# EAGLE board GPS_radiologger_v12 (EAGLE 9.5.1)
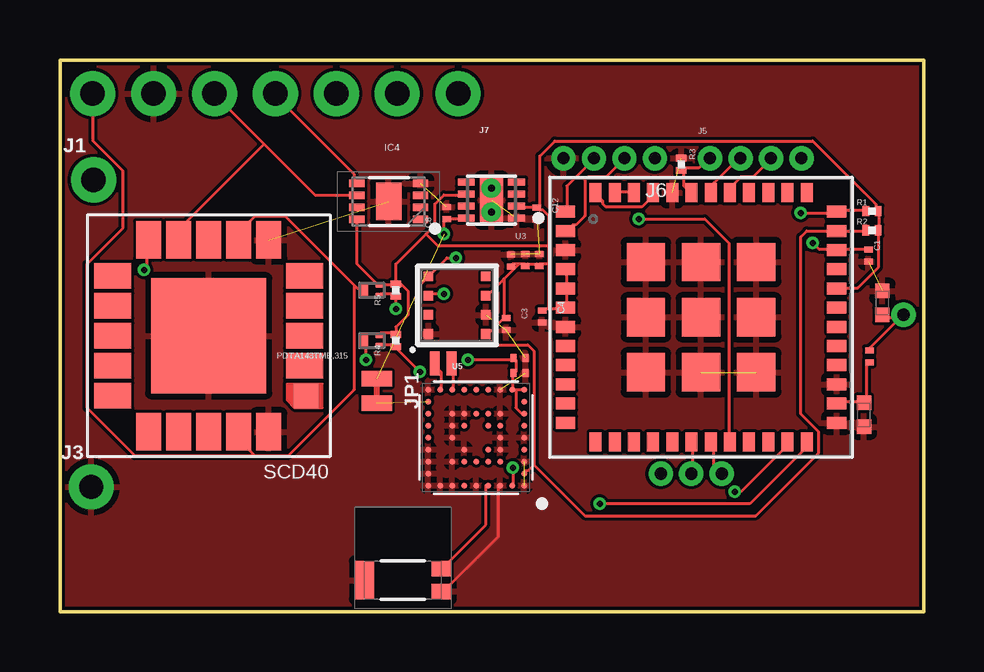
[diagram p0: board, top side]
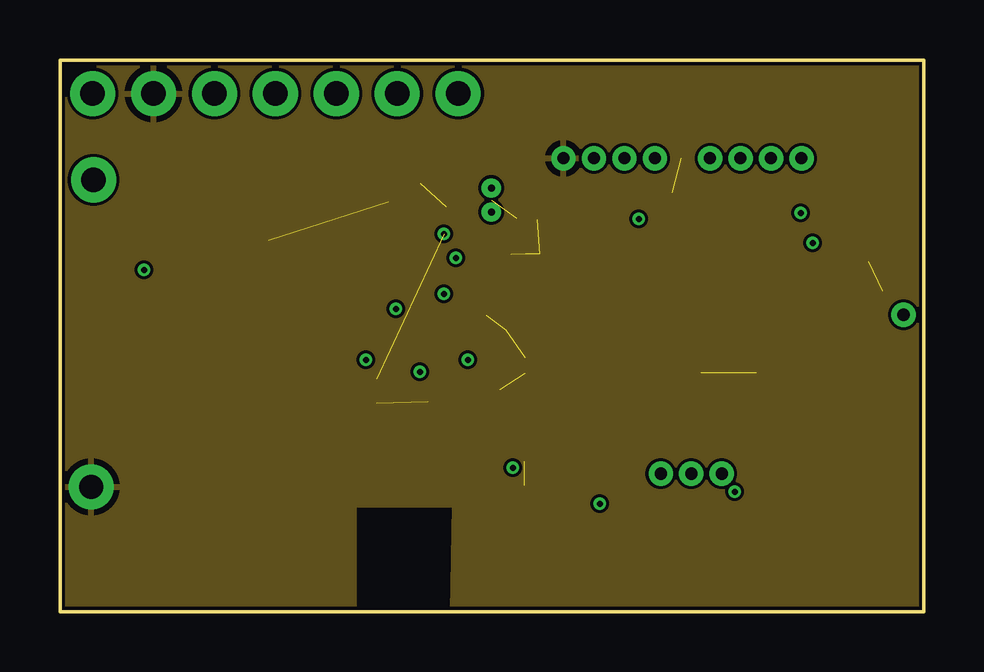
[diagram p1: board, inner layer Route2]
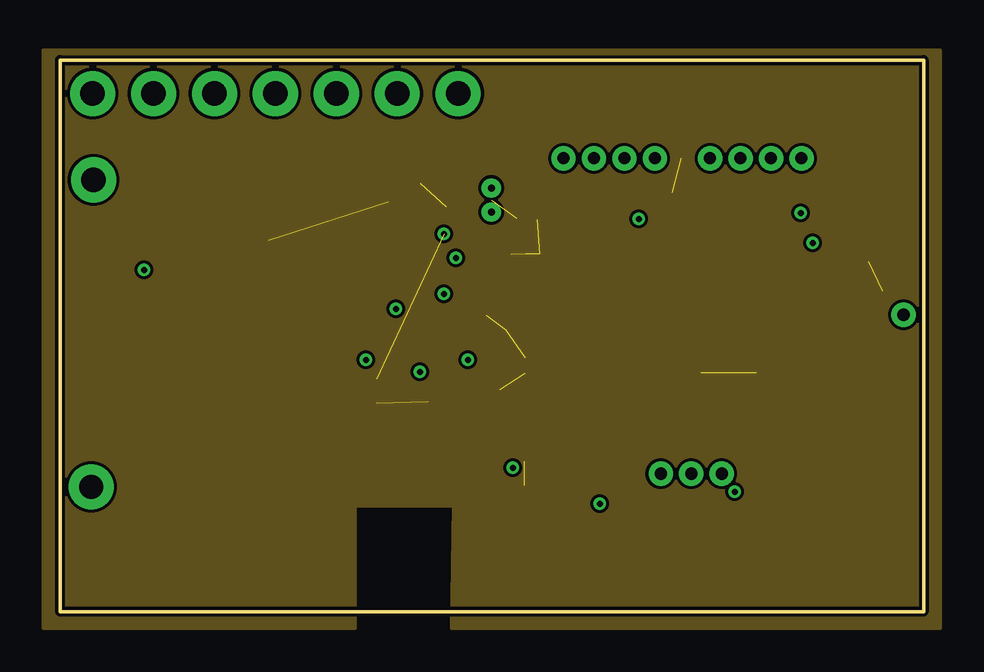
[diagram p2: board, inner layer Route15]
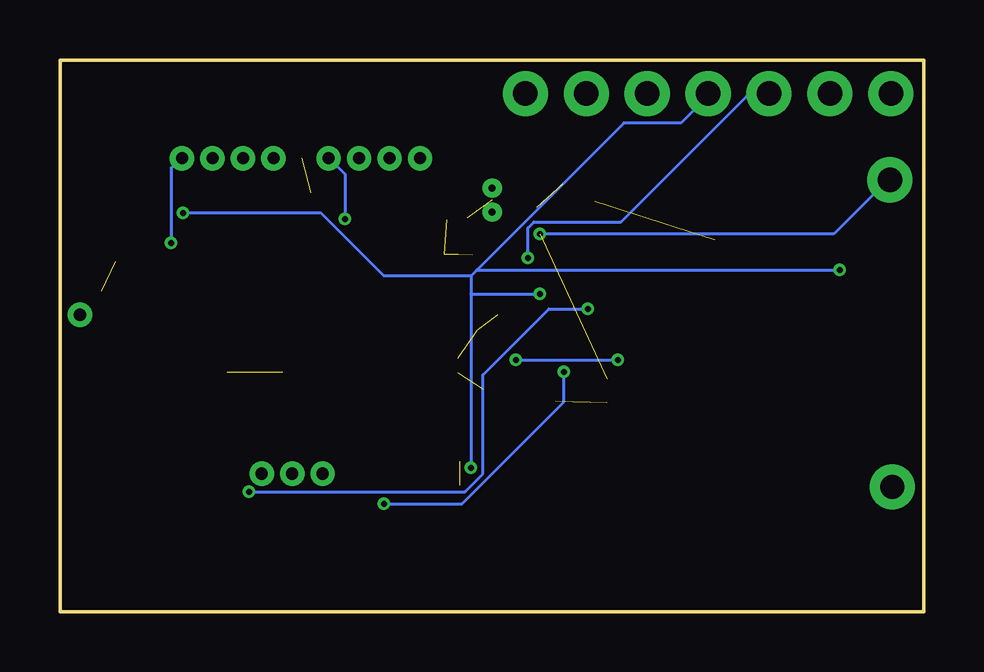
[diagram p3: board, bottom side, seen from below]

Size 36 x 23 mm. Coordinates in mm from the lower left corner, seen from the top.
Outline: 0,0 0,23 36,23 36,0 0,0
Copper layers (1+2*15+16): Top 0.035mm / dielectric 0.2mm / Route2 0.035mm / dielectric 0.23mm / Route15 0.035mm / dielectric 0.2mm / Bottom 0.035mm
Design rules "default *": minimum track width 5mil, minimum drill 0.25mm, track to track 5mil, track to pad 5mil, pad to pad 5mil, via to via 5mil, smd to smd 5mil, copper to edge 5mil, drill to drill 3mil, minimum pad ring 10mil, minimum via ring 5mil, stop-mask expansion 4mil, vias tented up to drill 0mil, thermal gap 10mil
Net classes: 1 vcc: width 0 mm

## Footprints (pad centres in the part's own frame; a part is rotated, then mirrored left to right if it is on the bottom)
C0201 = smd 0.25 x 0.35: 1 -0.25,0; 2 0.25,0
SON50P300X200X55-9N = smd 0.63 x 0.32: 1 -1.33,0.75; 2 -1.33,0.25; 3 -1.33,-0.25; 4 -1.33,-0.75; 5 1.33,-0.75; 6 1.33,-0.25; 7 1.33,0.25; 8 1.33,0.75 | smd 1.06 x 1.56: 9 0,0
1X01_NO_SILK = drill 1.016 pad 1.88: 1 0,0
1X01_SMALL = drill 0.508: P$1 0,0
1X03_1.27MM_NO_SILK = drill 0.508 pad 1: 1 0,0; 2 1.27,0; 3 2.54,0
1X04_1.27MM_NO_SILK = drill 0.508 pad 1: 1 0,0; 2 1.27,0; 3 2.54,0; 4 3.81,0
1X07_NO_SILK = drill 1.016 pad 1.88: 1 0,0; 2 2.54,0; 3 5.08,0; 4 7.62,0; 5 10.16,0; 6 12.7,0; 7 15.24,0
SMT-JUMPER_2_NC_TRACE_NO-SILK = smd 0.635 x 1.27: 1 -0.508,0; 2 0.508,0
0402-TIGHT = smd 0.6 x 0.6: 1 -0.5,0; 2 0.5,0
SOT883(B) = smd 0.4 x 0.25: 1 -0.35,0.225; 2 -0.35,-0.225 | smd 0.4 x 0.7: 3 0.35,0
R0201 = smd 0.28 x 0.43: 1 -0.255,0; 2 0.255,0
TYPEABZ = smd 0.8 x 0.5: P$1 -5.65,4.4; P$2 -5.65,3.6; P$3 -5.65,2.8; P$4 -5.65,2; P$5 -5.65,1.2; P$6 -5.65,0.4; P$7 -5.65,-0.4; P$8 -5.65,-1.2; P$9 -5.65,-2; P$10 -5.65,-2.8; P$11 -5.65,-3.6; P$12 -5.65,-4.4; P$25 5.65,-4.4; P$26 5.65,-3.6; P$27 5.65,-2.8; P$28 5.65,-2; P$29 5.65,-1.2; P$30 5.65,-0.4; P$31 5.65,0.4; P$32 5.65,1.2; P$33 5.65,2; P$34 5.65,2.8; P$35 5.65,3.6; P$36 5.65,4.4 | smd 0.5 x 0.8: P$13 -4.4,-5.2; P$14 -3.6,-5.2; P$15 -2.8,-5.2; P$16 -2,-5.2; P$17 -1.2,-5.2; P$18 -0.4,-5.2; P$19 0.4,-5.2; P$20 1.2,-5.2; P$21 2,-5.2; P$22 2.8,-5.2; P$23 3.6,-5.2; P$24 4.4,-5.2; P$37 4.4,5.2; P$38 3.6,5.2; P$39 2.8,5.2; P$40 2,5.2; P$41 1.2,5.2; P$42 0.4,5.2; P$43 -0.4,5.2; P$44 -1.2,5.2; P$45 -2,5.2; P$46 -2.8,5.2; P$47 -3.6,5.2; P$48 -4.4,5.2 | smd 1.6 x 1.6: P$49 -2.3,2.3; P$50 0,2.3; P$51 2.3,2.3; P$52 -2.3,0; P$53 0,0; P$54 2.3,0; P$55 -2.3,-2.3; P$56 0,-2.3; P$57 2.3,-2.3
UBLOX_ZOE_M8-0-10 = smd 0.25 x 0.25: 1 -1.996,2.004; 2 -1.496,2.004; 3 -0.996,2.004; 4 -0.496,2.004; 5 0.004,2.004; 6 0.504,2.004; 7 1.004,2.004; 8 1.504,2.004; 9 2.004,2.004; 10 2.004,1.504; 11 2.004,1.004; 12 2.004,0.504; 13 2.004,0.004; 14 2.004,-0.496; 15 2.004,-0.996; 16 2.004,-1.496; 17 2.004,-1.996; 18 1.504,-1.996; 19 1.004,-1.996; 20 0.504,-1.996; 21 0.004,-1.996; 22 -0.496,-1.996; 23 -0.996,-1.996; 24 -1.496,-1.996; 25 -1.996,-1.996; 26 -1.996,-1.496; 27 -1.996,-0.996; 28 -1.996,-0.496; 29 -1.996,0.004; 30 -1.996,0.504; 31 -1.996,1.004; 32 -1.996,1.504; 33 -0.996,1.004; 34 -0.496,1.004; 35 0.004,1.004; 36 0.504,1.004; 37 1.004,1.004; 38 1.004,0.004; 39 1.004,-0.496; 40 1.004,-0.996; 41 0.504,-0.996; 42 0.004,-0.996; 43 -0.496,-0.996; 44 -0.996,-0.996; 45 -0.996,-0.496; 46 -0.996,0.004; 47 -0.996,0.504; 48 -0.496,0.504; 49 0.504,0.504; 50 0.504,-0.496; 51 -0.496,-0.496
MICROCHIP_MCP1810T-33I-J8A_0 = smd 0.7 x 0.3: 1 -1.05,0.75; 2 -1.05,0.25; 3 -1.05,-0.25; 4 -1.05,-0.75; 5 1.05,-0.75; 6 1.05,-0.25; 7 1.05,0.25; 8 1.05,0.75 | smd 0.95 x 1.95: 9 0,0 | drill 0.3 pad 0.6: PAD_1 0,0.5; PAD_2 0,-0.5
LGA3.0X3.0 = smd 0.4 x 0.4: 1 1.2,1.2; 2 1.2,0.4; 3 1.2,-0.4; 4 1.2,-1.2; 5 -1.2,-1.2; 6 -1.2,-0.4; 7 -1.2,0.4; 8 -1.2,1.2
SCD40_LGA = smd 1 x 1: P$1 -4.05,2.5 | smd 1.55 x 1.05: P$2 -4,1.25; P$3 -4,0; P$4 -4,-1.25; P$5 -4,-2.5; P$11 4,-2.5; P$12 4,-1.25; P$13 4,0; P$14 4,1.25; P$15 4,2.5 | smd 1.05 x 1.55: P$6 -2.5,-4; P$7 -1.25,-4; P$8 0,-4; P$9 1.25,-4; P$10 2.5,-4; P$16 2.5,4; P$17 1.25,4; P$18 0,4; P$19 -1.25,4; P$20 -2.5,4 | smd 4.8 x 4.8: P$21 0,0
CRYSTAL-SMD-1.0X1.2MM = smd 0.4 x 1: P$1 0.35,0; P$2 -0.35,0
W3011 = smd 0.8 x 0.65: 1 1.6,0.475; 2 1.6,-0.475 | smd 0.8 x 1.6: 3 -1.6,0

## Placement (x,y rotation side)
C1  0.1 uF  [C0201]  33.7,14.85 270 top
C2  10 uF  [C0201]  18.8,14.64 270 top
C3  0.1 uF  [C0201]  18.6,12 270 top
C4  0.1 uF  [C0201]  20.1,12.3 270 top
C5  4.7 uF  [C0201]  19.15,10.57 0 top
C6  0.1 uF  [C0201]  19.15,9.95 0 top
C8  4.7 uF  [C0201]  16.12,16.62 90 top
C9  1 uF  [C0201]  19.4,14.65 270 top
C10  0.1 uF  [C0201]  19.98,14.65 270 top
C11  0.1 uF  [C0201]  33.74,10.64 270 top
C12  10 uF  [C0201]  19.88,16.6 270 top
IC4  CAT24M01HU5I-GT3  [SON50P300X200X55-9N]  13.7,17.1 180 top
J1  [1X01_NO_SILK]  1.4,18 0 top
J2  [1X01_SMALL]  35.16,12.38 0 top
J3  [1X01_NO_SILK]  1.3,5.2 0 top
J4  [1X03_1.27MM_NO_SILK]  25.05,5.75 0 top
J5  [1X04_1.27MM_NO_SILK]  27.1,18.9 0 top
J6  [1X04_1.27MM_NO_SILK]  24.8,18.9 180 top
J7  [1X07_NO_SILK]  16.6,21.6 180 top
JP1  JUMPER-SMT_2_NC_TRACE_NO-SILK  [SMT-JUMPER_2_NC_TRACE_NO-SILK]  13.2,9.2 270 top
L3  FERRITE_BEAD-120_OHM_TIGHT  [0402-TIGHT]  33.51,8.21 270 top
L4  FERRITE_BEAD-120_OHM_TIGHT  [0402-TIGHT]  34.28,12.87 90 top
PDTA143TMB,1  TINYPICO-PNPAMB  [SOT883(B)]  13,13.4 180 top
PDTA143TMB,315  TINYPICO-PNPAMB  [SOT883(B)]  13,11.3 180 top
R1  4.7  [R0201]  33.85,16.7 0 top
R2  4.7  [R0201]  33.85,15.9 0 top
R3  10k  [R0201]  25.9,18.65 270 top
R4  100k  [R0201]  14,11.3 90 top
R5  100k  [R0201]  14,13.4 90 top
U1  TYPEABZ  [TYPEABZ]  26.73,12.27 0 top
U2  UBLOX_ZOE_M8-0-10  [UBLOX_ZOE_M8-0-10]  17.35,7.25 180 top
U3  MICROCHIP_MCP1810T-33I-J8AMICROCHIP_MCP1810T-33I-J8A_0_0  [MICROCHIP_MCP1810T-33I-J8A_0]  17.99,17.16 180 top
U5  BME680BME680  [LGA3.0X3.0]  16.56,12.77 180 top
U$1  SCD40  [SCD40_LGA]  6.2,11.5 180 top
Y1  32.768kHz  [CRYSTAL-SMD-1.0X1.2MM]  15.97,10.34 0 top
Y2  W3011  [W3011]  14.29,1.31 0 top

## Library data of the parts
C1-C6 C8-C12 = rcl; SPICEPREFIX: C
IC4 = CAT24M01HU5I-GT3-CorrectedV2; ALLIED_NUMBER: 70300250; ALLIED_PRICE-STOCK: http://www.alliedelec.com/on-semiconductor-cat24m01hu5i-gt3/70300250/; DESCRIPTION: EEPROM 1MB I2C SERIAL EEPROM; HEIGHT: 0.55mm; MANUFACTURER_NAME: ON Semiconductor; MANUFACTURER_PART_NUMBER: CAT24M01HU5I-GT3; MOUSER_PART_NUMBER: 863-CAT24M01HU5I-GT3; MOUSER_PRICE-STOCK: https://www.mouser.com/Search/Refine.aspx?Keyword=863-CAT24M01HU5I-GT3; RS_PART_NUMBER: 7814831P; RS_PRICE-STOCK: http://uk.rs-online.com/web/p/products/7814831P
J1-J7 = SparkFun-Connectors
JP1 = SparkFun-Jumpers
L3 L4 = SparkFun-Coils
PDTA143TMB,1 PDTA143TMB,315 = UnexpectedMaker
R1-R5 = rcl; SPICEPREFIX: R
U1 = Kris
U2 = SparkFun-GPS; PROD_ID: IC-14251
U3 = MCP1810; CENTROID_NOT_SPECIFIED: No; DATASHEET: http://ww1.microchip.com/downloads/en/DeviceDoc/20005623A.pdf; DIGIKEY_DESCRIPTION: IC REG LINEAR 150MA 8-VDFN; DIGIKEY_PART_NUMBER: MCP1810T-33I/J8ACT-ND; IPC_LAND_PATTERN_NAME: DFN200X200X85-8; LEAD_FREE: yes; MF: Microchip; MFG_PACKAGE_IDENT: C04-3207A; MOUSER_PART_NUMBER: 579-MCP1810T-33I/J8A; MPN: MCP1810T-33I/J8A; PACKAGE: VDFN8; PREFIX: U; ROHS: yes; TEMPERATURE_RANGE_HIGH: +85°C; TEMPERATURE_RANGE_LOW: -40°C
U5 = SparkFun-Sensors; PROD_ID: IC-14656
U$1 = Sensirion
Y1 = SparkFun-Clocks; XTAL: SC12S-7PF20PPM
Y2 = SparkFun-GPS; PROD_ID: ANT-14304

## Nets
ANT: C11.1 J2.P$1 L4.1
BAT: C8.1 J1.1 JP1.1 U3.7 U3.8
BOOT: J5.1 R3.2 U1.P$43
DM: J6.2 U1.P$2
DP: J6.3 U1.P$1
GND: C1.2 C2.1 C3.2 C4.2 C5.2 C6.2 C8.2 C9.1 C10.1 C12.2 IC4.4 IC4.9 J3.1 J6.4 J7.6 L3.2 L4.2 R3.1 U1.P$3 U1.P$7 U1.P$25 U1.P$27 U1.P$44 U1.P$49 U1.P$50 U1.P$51 U1.P$52 U1.P$53 U1.P$54 U1.P$55 U1.P$56 U1.P$57 U2.1 U2.3 U2.5 U2.7 U2.8 U2.9 U2.10 U2.11 U2.12 U2.17 U2.23 U2.29 U2.31 U2.37 U2.38 U2.39 U2.40 U2.41 U2.44 U2.46 U2.47 U2.49 U3.1 U3.9 U5.1 U5.7 U$1.P$6 U$1.P$20 U$1.P$21 Y2.2 Y2.3
GPS_ANT: U2.4 Y2.1
N$1: U1.P$45 U1.P$48
N$2: JP1.2 U2.16
N$3: U1.P$22
N$14: U2.18 Y1.P$2
N$15: U2.19 Y1.P$1
N$32: C11.2 L3.1 U1.P$26
POWER: C2.2 C3.1 C4.1 C9.2 C10.2 C12.1 IC4.8 PDTA143TMB,1.2 PDTA143TMB,315.2 R1.2 R2.2 R4.2 R5.2 U1.P$4 U1.P$5 U1.P$6 U1.P$32 U3.2 U3.6 U5.6 U5.8
PWM: J7.2
RDY: J7.3
RST: C1.1 J5.4 U1.P$34
RX: J4.2 U1.P$18
SCD_PDTA: PDTA143TMB,1.1 R5.1 U1.P$23
SCD_PWR: J7.7 PDTA143TMB,1.3 U$1.P$7 U$1.P$19
SCL: IC4.6 J7.5 R2.1 U1.P$35 U2.32 U5.4 U$1.P$9
SDA: IC4.5 J7.4 R1.1 U1.P$36 U2.2 U5.3 U$1.P$10
SEL: J7.1
SWDCLK: J5.2 U1.P$42
SWDIO: J5.3 U1.P$41
TCXO_OUT: U1.P$46 U1.P$47
TX: J4.3 U1.P$19
V_DCDC_OUT: U2.26
VBUS: J6.1 U1.P$20
ZOE_PDTA: PDTA143TMB,315.1 R4.1 U1.P$24
ZOE_PWR: C5.1 C6.1 PDTA143TMB,315.3 U2.24 U2.25 U2.27

## Tracks (layer width: path | path; a pad name or v marks a point on that pad's centre or on a via)
ANT
  Top 0.127: 35,12.25 35.12,12.38 J2.P$1 35,12.25 | 35,12.25 33.75,11 C11.1 | 35,12.25 34.38,12.25 L4.1
BAT  (via drill 0.25)  (1 unrouted)
  Top 0.127: U3.7 17,16.88 17,16.5 U3.8 16.88,16.38 C8.1 16,16.25 v16,15.75
  Bottom 0.127: v16,15.75 3.75,15.75 1.5,18 J1.1
BOOT
  Top 0.127: U1.P$43 26.25,17.5 26,17.75 26,18.38 R3.2 26,18.5 26.62,18.5 27,18.88 J5.1
DM
  Top 0.127: U1.P$2 21.12,15.88 21.38,16.12 21.5,16.12 21.88,16.5 21.88,18 22,18.12 22.75,18.12 23.5,18.88 J6.2
DP
  Top 0.127: U1.P$1 21.12,16.75 21.12,17.75 22.25,18.88 J6.3
GND  (13 unrouted)
  Top 0.127: Y2.2 16,0.88 18.25,3.12 18.25,5.25 U2.3
  pour Route2: -0.9,23.6 36.9,23.6 36.9,-1.1 16.3,-1.1 16.4,4.4 12.3,4.4 12.3,-1.01 -0.9,-0.99
  pour Top: -0.4,23.2 36.5,23.2 36.5,-0.4 16.4,-0.4 16.4,4.4 12.3,4.4 12.3,-0.4 -0.4,-0.4
GPS_ANT
  Top 0.127: U2.4 17.75,5.25 17.75,3.62 16,1.88 Y2.1
N$1
  Top 0.127: U1.P$48 22.38,17.38 22.62,17.12 22.62,17 22.75,16.88 24.25,16.88 24.75,17.38 U1.P$45
N$2  (1 unrouted)
N$14
  Top 0.127: U2.18 15.88,9.38 15.88,10 15.62,10.25 Y1.P$2
N$15
  Top 0.127: U2.19 16.38,9.38 16.38,10.25 Y1.P$1
N$32
  Top 0.127: C11.2 33.62,10.38 33.62,8.75 L3.1 33.5,8.75 32.5,8.75 U1.P$26
POWER
  Top 0.127: 14,11.62 13.38,11.62 PDTA143TMB,315.2 | 14,13.62 PDTA143TMB,1.2 13.25,13.62 12.38,14.5 12.38,16.25 IC4.8 | 14,11.62 14,11.88 14.5,12.38 14.5,13.38 14.25,13.62 14,13.62 | 14,11.62 R4.2 | 14,13.62 R5.2 14,14.5 15.25,15.75 | 15.25,15.75 15.62,16.12 15.62,17 16,17.38 16.88,17.38 U3.6 | U1.P$32 32.5,13.5 33.25,13.5 34.12,14.38 34.12,15.88 R2.2 34.12,16 34.12,16.62 R1.2 34,16.75 34,17 31.38,19.62 20.62,19.62 20,19 20,16.88 C12.1 | 18.5,12.25 17.88,11.62 U5.8 | 19.12,14.5 19.38,14.5 C9.2 19.5,14.5 19.88,14.5 C10.2 20,14.5 20.38,14.5 | 19.12,14.5 18.88,14.5 C2.2 | 19.12,14.5 18.5,13.88 | 18.5,13.88 17.88,13.25 U5.6 | 18.5,13.88 18.5,12.25 | 18.5,12.25 C3.1 | C12.1 19.88,16.88 19.12,16.88 U3.2 | 20.38,12.62 21,12.62 U1.P$6 21.12,12.75 21.12,13.38 U1.P$5 21.12,13.5 21.12,14.25 U1.P$4 | 20.38,12.62 20.12,12.62 C4.1 | 20.38,12.62 20.38,14.5 | 20.38,14.5 20.38,15.25 | 20.38,15.25 20.38,16.5 20.12,16.75 20,16.75 C12.1 | 15.25,15.75 15.75,15.25 20.38,15.25
  pour Route15: -0.7,23.4 36.7,23.4 36.7,-0.7 16.32,-0.7 16.4,4.4 12.3,4.4 12.3,-0.7 -0.7,-0.7
RST  (via drill 0.25)
  Top 0.127: C1.1 33.62,15.12 32.5,15.12 U1.P$34 32.38,15.12 31.62,15.12 v31.38,15.38
  Bottom 0.127: v31.38,15.38 31.38,18.5 31,18.88 J5.4
RX
  Top 0.127: U1.P$18 26.38,7 26.38,5.75 J4.2
SCD_PDTA  (via drill 0.25)
  Top 0.127: PDTA143TMB,1.1 13.38,13.25 14,13.25 R5.1 v14,12.62 | v28.12,5 28.38,5 30.38,7 U1.P$23
  Bottom 0.127: v14,12.62 15.62,12.62 18.38,9.88 18.38,5.75 19.12,5 v28.12,5
SCD_PWR
  Top 0.127: 12.25,13.62 9.38,16.5 8.12,16.5 7.5,15.88 7.5,15.5 U$1.P$7 | 12.25,13.62 12.38,13.5 12.62,13.5 PDTA143TMB,1.3 | 8.12,6.5 7.5,7.12 7.5,7.5 U$1.P$19 | 8.12,6.5 9.5,6.5 12.25,9.25 12.25,13.62 | 8.12,6.5 3.12,6.5 1.12,8.5 1.12,14.5 2.62,16 2.62,18.38 1.38,19.62 1.38,21.5 J7.7
SCL  (via drill 0.25)
  Top 0.127: 8.5,19.5 6.5,21.5 J7.5 | 8.5,19.5 10.62,17.38 12.25,17.38 IC4.6 | 8.5,19.5 5,16 5,15.5 U$1.P$9 | R2.1 33.5,15.88 32.5,15.88 U1.P$35 31.12,15.88 30.88,15.62 30.88,8.25 31.62,7.5 31.62,6.62 29,4 21.88,4 19.75,6.12 | 19.75,6.12 19.5,5.88 19.38,5.88 U2.32 | 19.75,6.12 19.75,10.88 19.5,11.12 15.12,11.12 14.88,11.38 14.88,13.5 15.25,13.88 U5.4 15.38,14 16.12,14.75 v16.5,14.75
  Bottom 0.127: v16.5,14.75 16.5,16 16.25,16.25 12.62,16.25 7.38,21.5 6.5,21.5 J7.5
SDA  (via drill 0.25)
  Top 0.127: R1.1 33.5,16.75 32.5,16.75 U1.P$36 32.38,16.62 v30.88,16.62 | v18.88,6 18.88,5.38 U2.2 | v16,13.25 15.38,13.25 U5.3 | IC4.5 12.25,17.88 12.25,18.25 9,21.5 J7.4 | v3.5,14.25 3.62,14.38 3.62,15.5 U$1.P$10
  Bottom 0.127: 18.88,14 18.88,13.25 | 18.88,13.25 v18.88,6 | 18.62,14.25 12.5,20.38 10.12,20.38 9,21.5 J7.4 | 18.62,14.25 18.88,14 | 18.88,13.25 v16,13.25 | v30.88,16.62 25.12,16.62 22.5,14 18.88,14 | 18.62,14.25 v3.5,14.25
SWDCLK
  Top 0.127: U1.P$42 27.25,17.5 27.25,17.88 28.25,18.88 J5.2
SWDIO
  Top 0.127: U1.P$41 28,17.5 28,17.75 28.38,18.12 28.88,18.12 29.62,18.88 J5.3
TCXO_OUT
  Top 0.127: U1.P$47 23.25,17.5 23.88,17.5 U1.P$46
TX
  Top 0.127: U1.P$19 27.25,7 27.25,6 27.5,5.75 J4.3
VBUS  (via drill 0.25)
  Top 0.127: v24.12,16.38 26.88,16.38 27.88,15.38 27.88,7.12 U1.P$20
  Bottom 0.127: v24.12,16.38 24.12,18.25 24.75,18.88 J6.1
ZOE_PDTA  (via drill 0.25)
  Top 0.127: PDTA143TMB,315.1 13.38,11.12 14,11.12 R4.1 14,11 v15,10 | v22.5,4.5 28.75,4.5 31.25,7 U1.P$24
  Bottom 0.127: v15,10 15,8.75 19.25,4.5 v22.5,4.5
ZOE_PWR  (via drill 0.25)
  Top 0.127: 19,9.25 19.25,9.25 U2.25 | 19,9.25 18.88,9.25 U2.24 18.88,9.38 18.88,9.88 C6.1 19,10 19,10.5 C5.1 18.88,10.5 v17,10.5 | 19,9.25 19,8.5 19.25,8.25 U2.27 | v12.75,10.5 12.75,11.25 PDTA143TMB,315.3
  Bottom 0.127: v17,10.5 v12.75,10.5